# Altium PCB Switch.PcbDoc
Units mm, origin at the board's own origin, x right, y up, seen from the top; angles counter-clockwise.
Board outline 34.29 x 56.01 mm, 2 copper layers (Top Layer, Bottom Layer); 19 components, 13 nets, 51 pads, 0 vias.
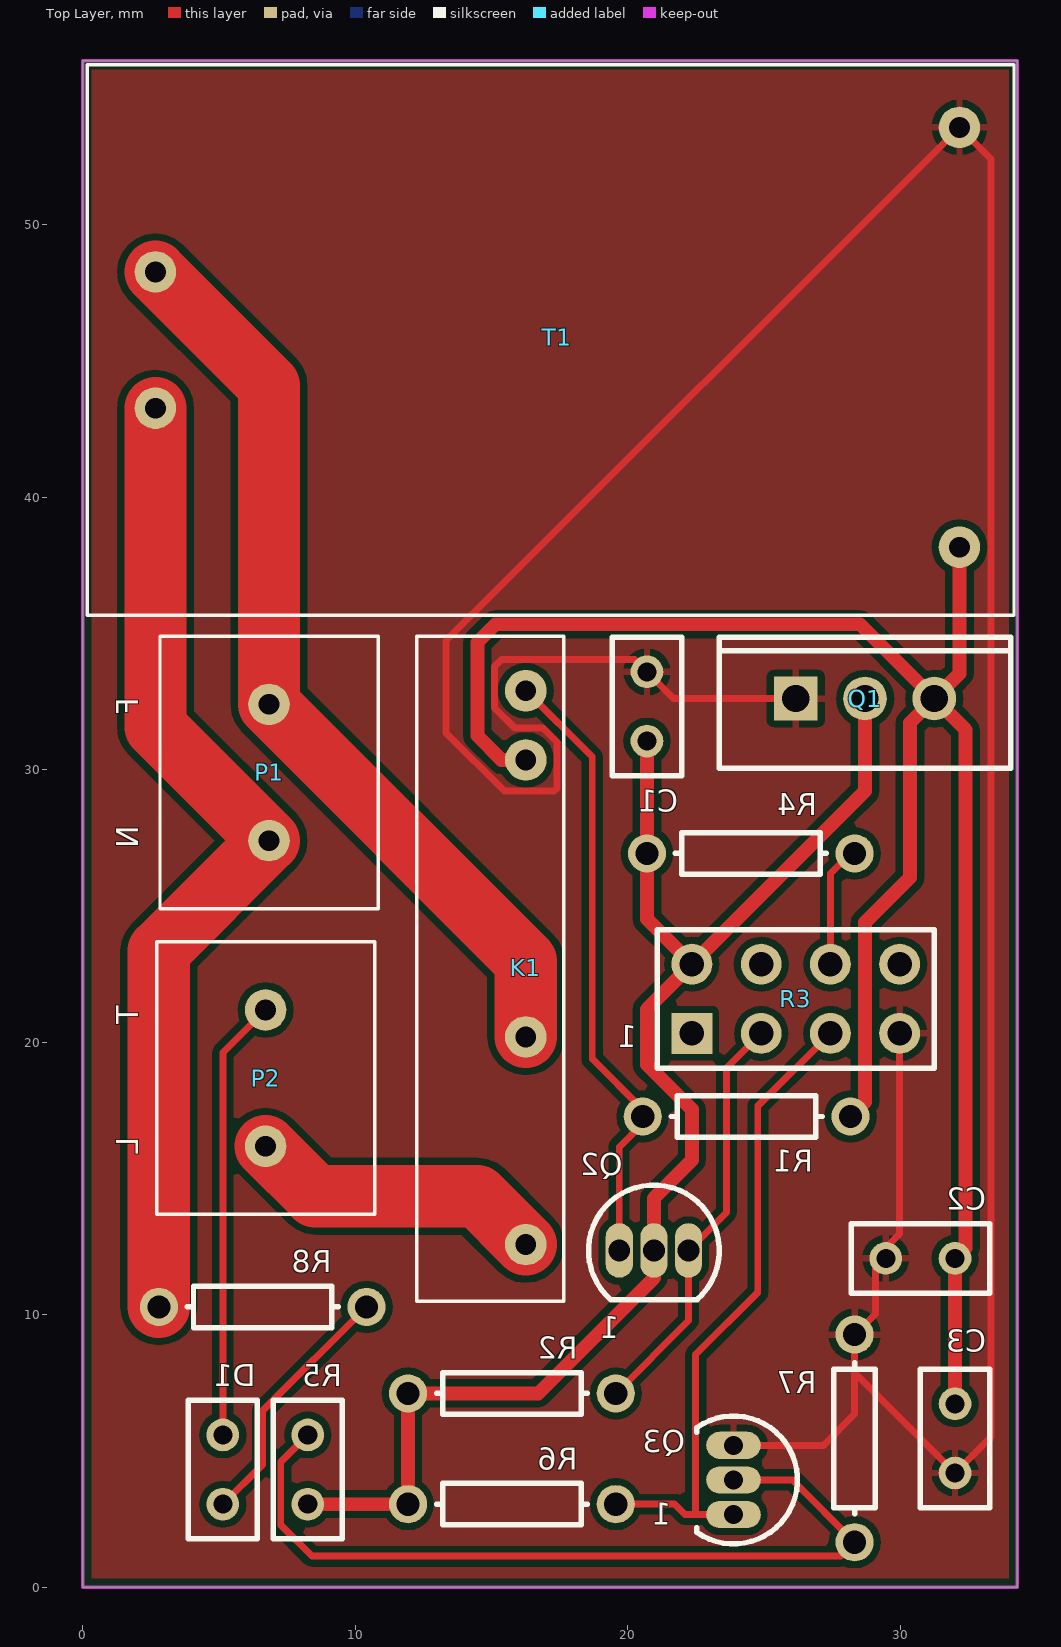
[diagram p0: Top Layer view]
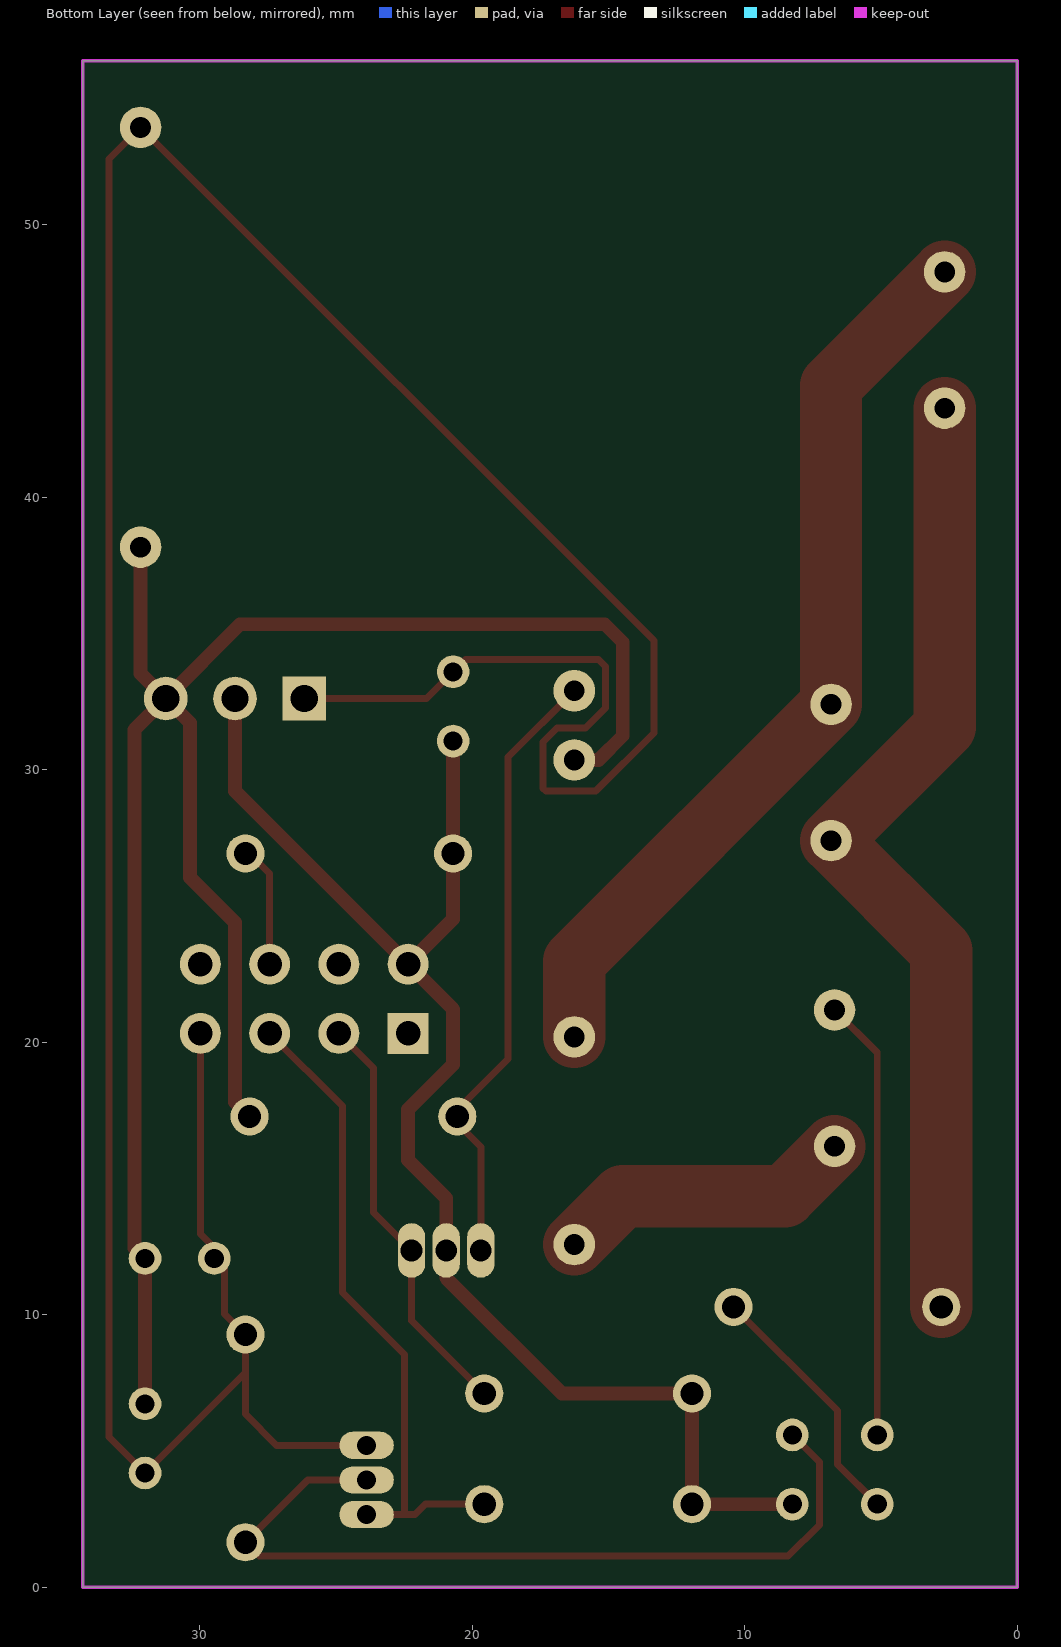
[diagram p1: Bottom Layer view, seen from below]

## Layer stack, top to bottom
Top Solder: solder mask 0.0102, Solder Resist, Dk 3.5
Top Layer: signal copper 0.0356
Dielectric 1: dielectric 0.32, FR-4, Dk 4.8
Bottom Layer: signal copper 0.0356
Bottom Solder: solder mask 0.0102, Solder Resist, Dk 3.5

## Board outline
0,0 0,56.007 34.29,56.007 34.29,0

## Design rules (kind name [scope] priority, off if disabled: settings)
Clearance [All] p1: gap=0.254 ignorepadtopadclearanceinfootprint=FALSE except(0: Arc-Hole Track-Hole SMDPad-Hole THPad-Hole Via-Hole Fill-Hole Poly-Hole Region-Hole Text-Hole)
PolygonConnect [All] p1: connectstyle=Relief reliefconductorwidth=0.254 reliefentries=4 polygonreliefangle="90 Angle" airgapwidth=0.254
RoutingLayers [All] p1: top layer_v5=TRUE bottom layer_v5=FALSE
RoutingVias [All] p1: holewidth=0.711 width=1.27 viastyle="Through Hole" minholewidth=0.711 minwidth=1.27 maxholewidth=0.711 maxwidth=1.27
SolderMaskExpansion [All] p1: expansion=0.102
Width "Schematic Width Constraint_6" [InNet('220VAC')] p1: maxlimit=2.54 minlimit=1.524 preferedwidth=2.286
Width "Schematic Width Constraint_1" [InNet('NetK1_1')] p2: maxlimit=2.54 minlimit=1.524 preferedwidth=2.286
Width "Schematic Width Constraint_2" [InNet('+3.3VDC')] p3: maxlimit=0.762 minlimit=0.381 preferedwidth=0.635 toplayer_maxwidth=0.635 toplayer_prefwidth=0.508 bottomlayer_minwidth=0.508 minimp=50.000000 maximp=50.000000 favimp=50.000000
Width "Schematic Width Constraint" [InNet('+5VDC')] p4: maxlimit=0.762 minlimit=0.381 preferedwidth=0.635 toplayer_maxwidth=0.635 toplayer_prefwidth=0.508 bottomlayer_minwidth=0.508 minimp=50.000000 maximp=50.000000 favimp=50.000000
Width "Schematic Width Constraint_5" [InNet('Power GND')] p5: maxlimit=2.54 minlimit=1.524 preferedwidth=2.286
Width [All] p6: maxlimit=0.254 minlimit=0.254 preferedwidth=0.254
29 further rules are at their usual default settings.

## Components (designator, comment, footprint, x,y, rotation, side; value= is the part's Value field where it differs from the comment)
C1 "100nf" RAD-0.1 20.701,32.316 r270 top value=100nF
C2 "Cap Pol1" RAD-0.1 30.734,12.065 r180 top value=100uf
C3 "Cap" RAD-0.1 32.004,5.461 r270 top value=100nf
D1 "LED0" RAD-0.1 5.14,4.318 r90 top
K1 "G3MB-202P DC5" "G3MB-202P DC5" 12.256,34.893 r270 top
P1 "Power" ScrewTerminal-X2 2.834,34.893 r270 top
P2 "Load" ScrewTerminal-X2 2.707,23.68 r270 top
Q1 "Regulador 3.3V" TO-220-AB 28.702,32.606 r0 top
Q2 "2N7000" SOT54 20.955,12.356 r270 top
Q3 "NPN" TO-92 23.876,3.937 r180 top
R1 "10K" AXIAL-0.3 24.357,17.272 r0 top
R2 "10K" AXIAL-0.3 15.748,7.112 r180 top
R3 "ESP01" HDR2X4 22.352,20.32 r0 top
R4 "10K" AXIAL-0.3 24.511,26.924 r180 top value=1K
R5 "LDR" RAD-0.1 8.255,4.318 r270 top
R6 "10K" AXIAL-0.3 15.748,3.048 r180 top value=1K
R7 "10K" AXIAL-0.3 28.321,5.461 r90 top value=1K
R8 "10K" AXIAL-0.3 6.604,10.287 r180 top value=130K
T1 "220VAC - 5VDC" HLK-PM 2.667,48.26 r0 top

## Footprints (in the part's own frame and the unit in brackets; to place one, negate y for a bottom-side part, rotate by r counter-clockwise, add the part's x,y. Pads: shape width x height; smd on the part's side, far side on the other; paste and mask are expansions set on the pad)
AXIAL-0.3 [mm] "Axial Device, Thru-Hole; 2 Leads; 0.3 in Pin Spacing"
  round 1.4 hole 0.85: 1(-3.81,0) 2(3.81,0)
  silkscreen extent -2.77,-0.76 2.77,0.76
"G3MB-202P DC5" [mil] "RELAY MINI SSR 240VAC@2A ZERO"
  round 60 hole 30: 1(878.74,157.48) 2(578.74,157.48) 3(178.74,157.48) 4(78.74,157.48)
  silkscreen extent 0,0 961,213
HDR2X4 [mm] "Connector; Header; 4x2 Position"
  rect 1.5x1.5 hole 0.9: 1(0,0)
  round 1.5 hole 0.9: 2(0,2.54) 3(2.54,0) 4(2.54,2.54) 5(5.08,0) 6(5.08,2.54) 7(7.62,0) 8(7.62,2.54)
  silkscreen extent -1.27,-1.27 8.89,3.81
HLK-PM [mil] "Trans 220VAC-5/12/3,3 VDC"
  round 60 hole 30: 1(0,0) 2(0,-196.85) 3(1161.42,208.66) 4(1161.42,-397.64)
  silkscreen extent -98,-496 1240,299
RAD-0.1 [mm]
  round 1.2 hole 0.7: 1(-1.27,0) 2(1.27,0)
  silkscreen extent -2.54,-1.27 2.54,1.27
ScrewTerminal-X2 [mil]
  round 60 hole 30: 1(98.42,157.48) 2(295.27,157.48)
  silkscreen extent 0,0 394,315
SOT54 [mm] "TO, Flat Index; 3 In-Line, Axial Leads; Body Dia. 4.6mm; Leads 0.48 x 0.45 mm (max)"
  oval 2x1 hole 0.8: 1(0,-1.27) 2(0,0) 3(0,1.27)
  silkscreen extent -2.4,-2.4 1.8,2.4
TO-92 [mm] "TO, Flat Index; 3 In-Line, Axial Leads; Body Dia. 4.6mm; Leads 0.41 x 0.39 mm (max)"
  oval 2x1 hole 0.7: 1(0,1.27) 2(0,0) 3(0,-1.27)
  silkscreen extent -2.34,-2.34 1.35,2.34
TO-220-AB [mm] "TO, Thru-Hole, Vertical, Heatsink Mounted; 3 In-Line Leads; Pitch 2.54 mm"
  rect 1.6x1.6 hole 1: 1(-2.54,0)
  round 1.6 hole 1: 2(0,0) 3(2.54,0)
  silkscreen extent -5.35,-2.55 5.35,2.25

## Part data
C1: library part Cap, "Capacitor", LatestRevisionDate=17-Jul-2002, LatestRevisionNote="Re-released for DXP Platform.", PackageDescription="Radial Cap, Thru-Hole; 2 Leads; 0.3 in Pin Spacing", PackageReference=RAD-0.3, Published=8-Jun-2000, Publisher="Altium Limited"
C2: "Polarized Capacitor (Radial)", LatestRevisionDate=17-Jul-2002, LatestRevisionNote="Re-released for DXP Platform.", PackageDescription="Polarized Capacitor (Radial); 2 Leads", PackageReference=RB7.6-15, Published=8-Jun-2000, Publisher="Altium Limited"
C3: "Capacitor", LatestRevisionDate=17-Jul-2002, LatestRevisionNote="Re-released for DXP Platform.", PackageDescription="Radial Cap, Thru-Hole; 2 Leads; 0.3 in Pin Spacing", PackageReference=RAD-0.3, Published=8-Jun-2000, Publisher="Altium Limited"
D1: "Typical INFRARED GaAs LED", LatestRevisionDate=08-Jul-2005, LatestRevisionNote="Mech Layer 1 removed.", PackageDescription="LED; 2 Leads", PackageReference=LED-0, Published=8-Jun-2000, Publisher="Altium Limited"
K1: "RELAY MINI SSR 240VAC@2A ZERO", Mfr=Omron, Mfr PN="G3MB-202P DC5"
P1 P2: library part ScrewTerminal
Q1: library part AMS1117
Q2: "N-channel Enhancement Mode Field-effect Transistor", Code_JEDEC=TO-92, Code_JEITA=SC-43, ComponentLink1Description="Manufacturer Link", ComponentLink1URL=http://www.semiconductors.philips.com/, ComponentLink2Description=Datasheet, ComponentLink2URL=http://www.semiconductors.philips.com/acrobat/datasheets/2N7000-03.pdf, DatasheetVersion=19-May-2000, LatestRevisionDate=12-Dec-2006, LatestRevisionNote="Footprint pad sequence fixed.", PackageDescription="Plastic Single-Ended Leaded (through hole) package; 3 Leads (TO-92)", PackageReference=SOT54, PackageVersion=Feb-1997, Published=17-Sep-2003, Publisher="Altium Limited"
Q3: "NPN Bipolar Transistor", Code_JEDEC=TO-226-AA, LatestRevisionDate=17-Jul-2002, LatestRevisionNote="Re-released for DXP Platform.", PackageDescription="TO, Flat Index; 3 In-Line, Axial Leads; Body Dia. 4.8mm; Leads 0.55 x 0.51 mm (max)", PackageReference=TO-226-AA, Published=8-Jun-2000, Publisher="Altium Limited"
R1 R2 R4 R6 R7 R8: library part Res1, "Resistor", LatestRevisionDate=17-Jul-2002, LatestRevisionNote="Re-released for DXP Platform.", PackageDescription="Axial Device, Thru-Hole; 2 Leads; 0.3 in Pin Spacing", PackageReference=AXIAL-0.3, Published=8-Jun-2000, Publisher="Altium Limited"
T1: library part HLK-PM, "HLK-PM*", Mfr=HLK-PM01

## Nets (pads, with @x,y where several pads share a name; then routed paths per layer and width w, separated by ;. In a path a pad name is that pad's centre, name@x,y a point inside that pad or via, vN(x,y) a via of type N, cw(c..) or ccw(c..) an arc to the next point about the centre after c; other vN are vias at no path point)
220VAC: K1.2 P1.1 T1.1 | length 33.7
  Top Layer w2.286: T1.1 6.834,44.093 P1.1 16.256,22.971 K1.2
+3.3VDC: C1.2 Q1.2 Q2.2 R2.2 R3.2 R4.2 R5.2 R6.2 | length 53.3
  Top Layer w0.508: R5.2 R6.2 R2.2 16.713,7.112 20.955,11.354 Q2.2 20.955,14.275 22.352,15.672 22.352,17.526 20.701,19.177 20.701,21.209 R3.2 ; C1.2 20.701,27.078 20.547,26.924 20.701,26.77 20.701,24.511 R3.2 ; Q1.2 28.702,29.21 R3.2
+5VDC: C2.1 C3.1 K1.3 Q1.3 R1.2 T1.4 | length 72.8
  Top Layer w0.508: K1.3 15.367,30.353 14.478,31.242 14.478,34.671 15.138,35.331 28.517,35.331 Q1.3 ; R1.2 28.702,17.807 28.702,24.384 30.353,26.035 30.353,31.717 Q1.3 ; C3.1 C2.1 32.385,12.446 32.385,31.463 Q1.3 ; T1.4 32.167,33.532 Q1.3
GND: C1.1 C2.2 C3.2 Q1.1 Q3.3 R3.7 R7.2 T1.3 | length 128
  Top Layer w0.254: Q3.3 27.178,5.207 28.321,6.35 28.321,7.874 ; Q1.1 21.681,32.606 C1.1 20.251,34.036 15.367,34.036 15.113,33.782 15.113,32.258 15.85,31.521 16.891,31.521 17.399,31.013 17.399,29.312 17.297,29.21 15.469,29.21 13.335,31.344 13.335,34.728 T1.3 33.325,52.402 33.325,5.512 C3.2 28.321,7.874 ; R3.7 29.972,12.954 29.083,12.065 29.083,10.033 R7.2 28.321,7.874
NetD1_1: D1.1 R8.1 | length 9.4
  Top Layer w0.254: D1.1 6.604,4.512 6.604,6.477 R8.1
NetD1_2: D1.2 P2.1 | length 16.2
  Top Layer w0.254: D1.2 5.14,19.613 P2.1
NetK1_1: K1.1 P2.2 | length 11
  Top Layer w2.286: P2.2 8.536,14.351 14.478,14.351 K1.1
NetK1_4: K1.4 Q2.1 R1.1 | length 22.7
  Top Layer w0.254: K1.4 18.694,30.455 18.694,19.379 20.547,17.526 R1.1 20.547,17.018 19.685,16.156 Q2.1
NetQ2_3: Q2.3 R2.1 R3.3 | length 15.4
  Top Layer w0.254: R2.1 22.225,9.779 Q2.3 23.622,13.753 23.622,19.05 R3.3
NetQ3_1: Q3.1 R3.5 R6.1 | length 24.2
  Top Layer w0.254: R6.1 21.717,3.048 22.098,2.667 22.479,2.667 ; Q3.1 22.479,2.667 ; R3.5 24.765,17.653 24.765,10.82 22.479,8.534 22.479,2.667
NetQ3_2: Q3.2 R5.1 R7.1 | length 30.8
  Top Layer w0.254: R5.1 7.264,4.597 7.264,2.286 8.407,1.143 27.813,1.143 R7.1 26.035,3.937 Q3.2
NetR3_2: R3.6 R4.1 | length 4.4
  Top Layer w0.254: R3.6 27.432,26.189 28.04,26.797 R4.1@28.294,26.797
"Power GND": P1.2 R8.2 T1.2 | length 36.4
  Top Layer w2.286: T1.2 2.667,31.56 P1.2 2.794,23.353 R8.2
pads on no net: R3.1 R3.4 R3.8

## Polygon pours and split planes (outlines as drawn)
GND on Top Layer "GND" (solid, pour order 0): 0,56.007 34.29,56.007 34.29,0 0,0

## Keep-outs
Keep-Out Layer:
  the board outline again, w0.127

## Silkscreen, mask and mechanical layers (free items; w line width, h text height)
Top Overlay:
  text "F" at 2.032,32.639 h0.8 r90
  text "N" at 2.032,27.94 h0.8 r90
  text "T" at 2.032,21.336 h0.8 r90
  text "L" at 2.032,16.51 h0.8 r90

## Text inside footprints (layer, text, board x,y; h text height)
Q2: Top Overlay "1" at 19.685,9.144 h0.8
Q3: Top Overlay "1" at 21.59,2.286 h0.8
R3: Top Overlay "1" at 20.32,19.812 h0.8